# Allegro board BD9G341EFJ-E2EVK-101_BRD_REV00_2014-11-05.brd
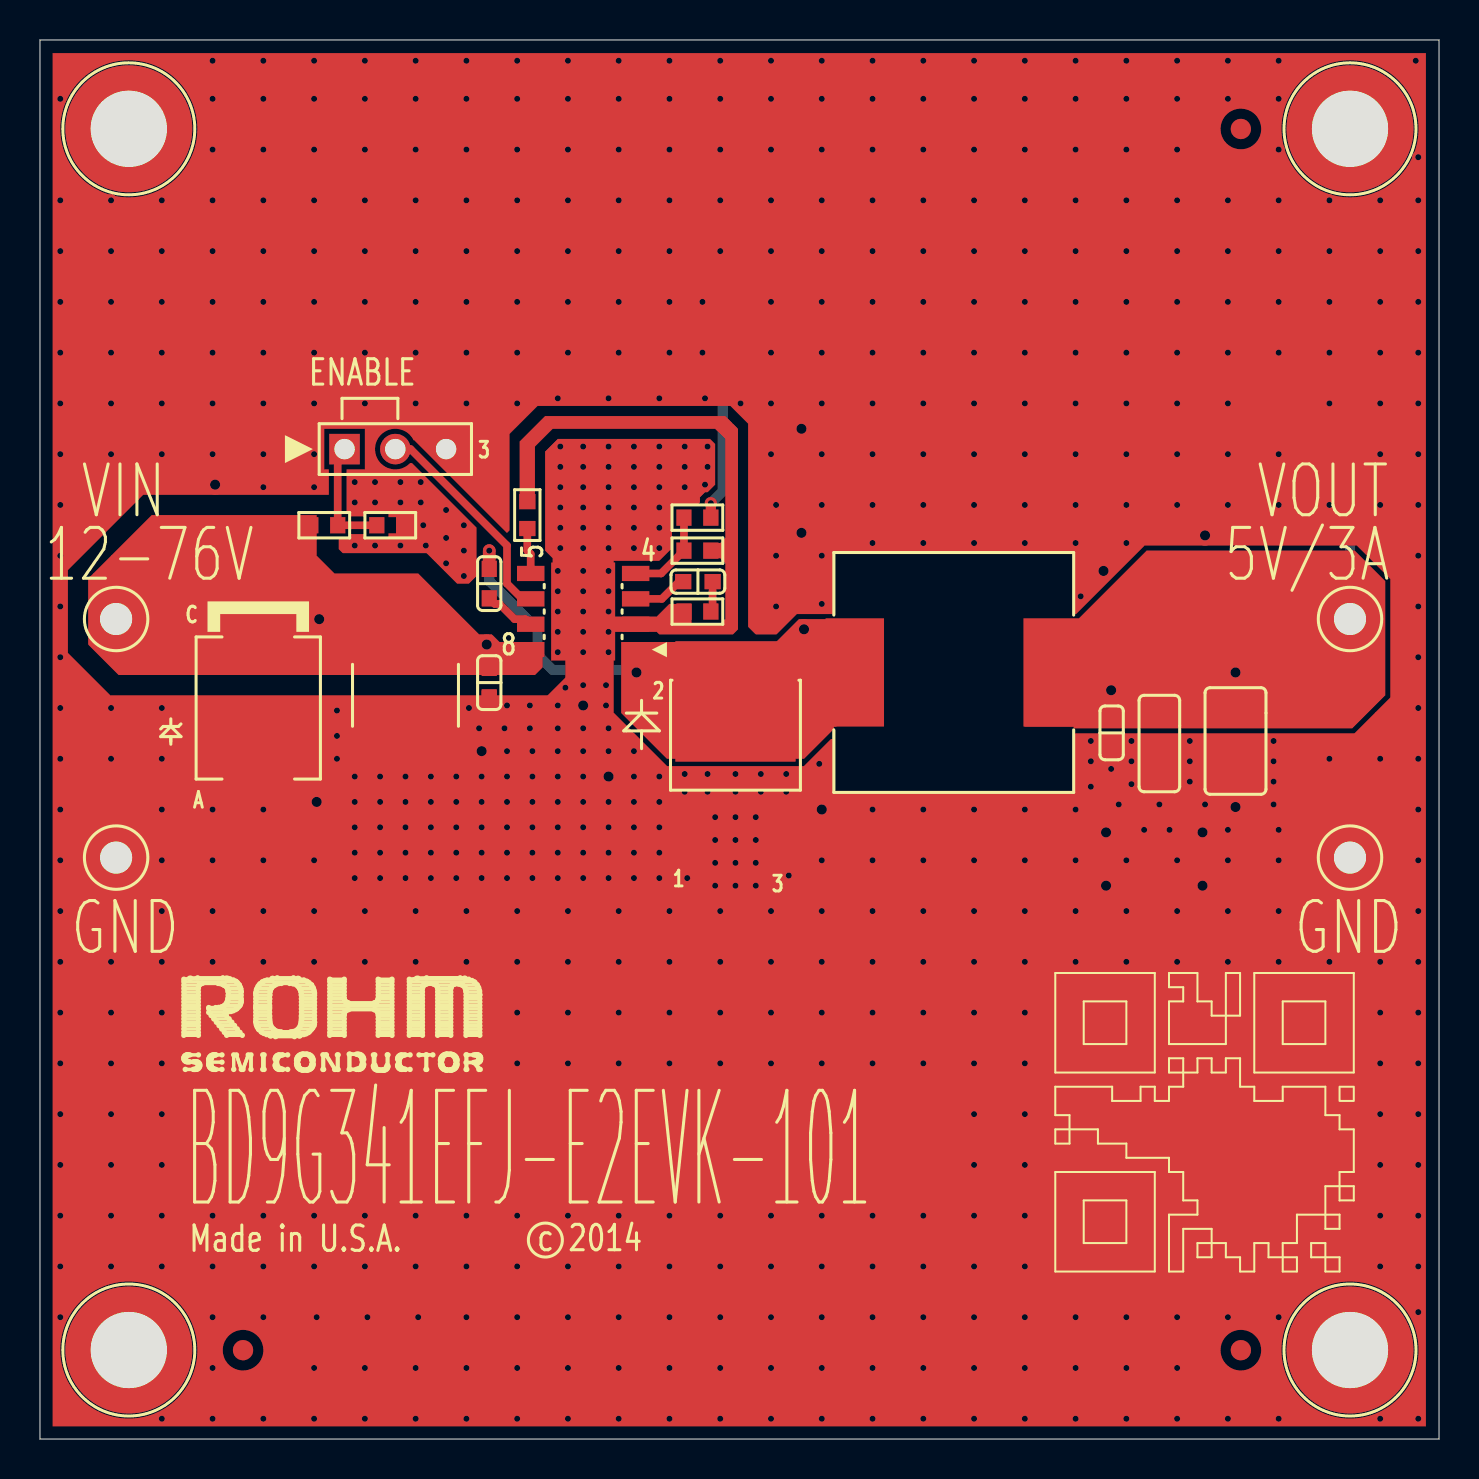
[diagram p0: board, top side]
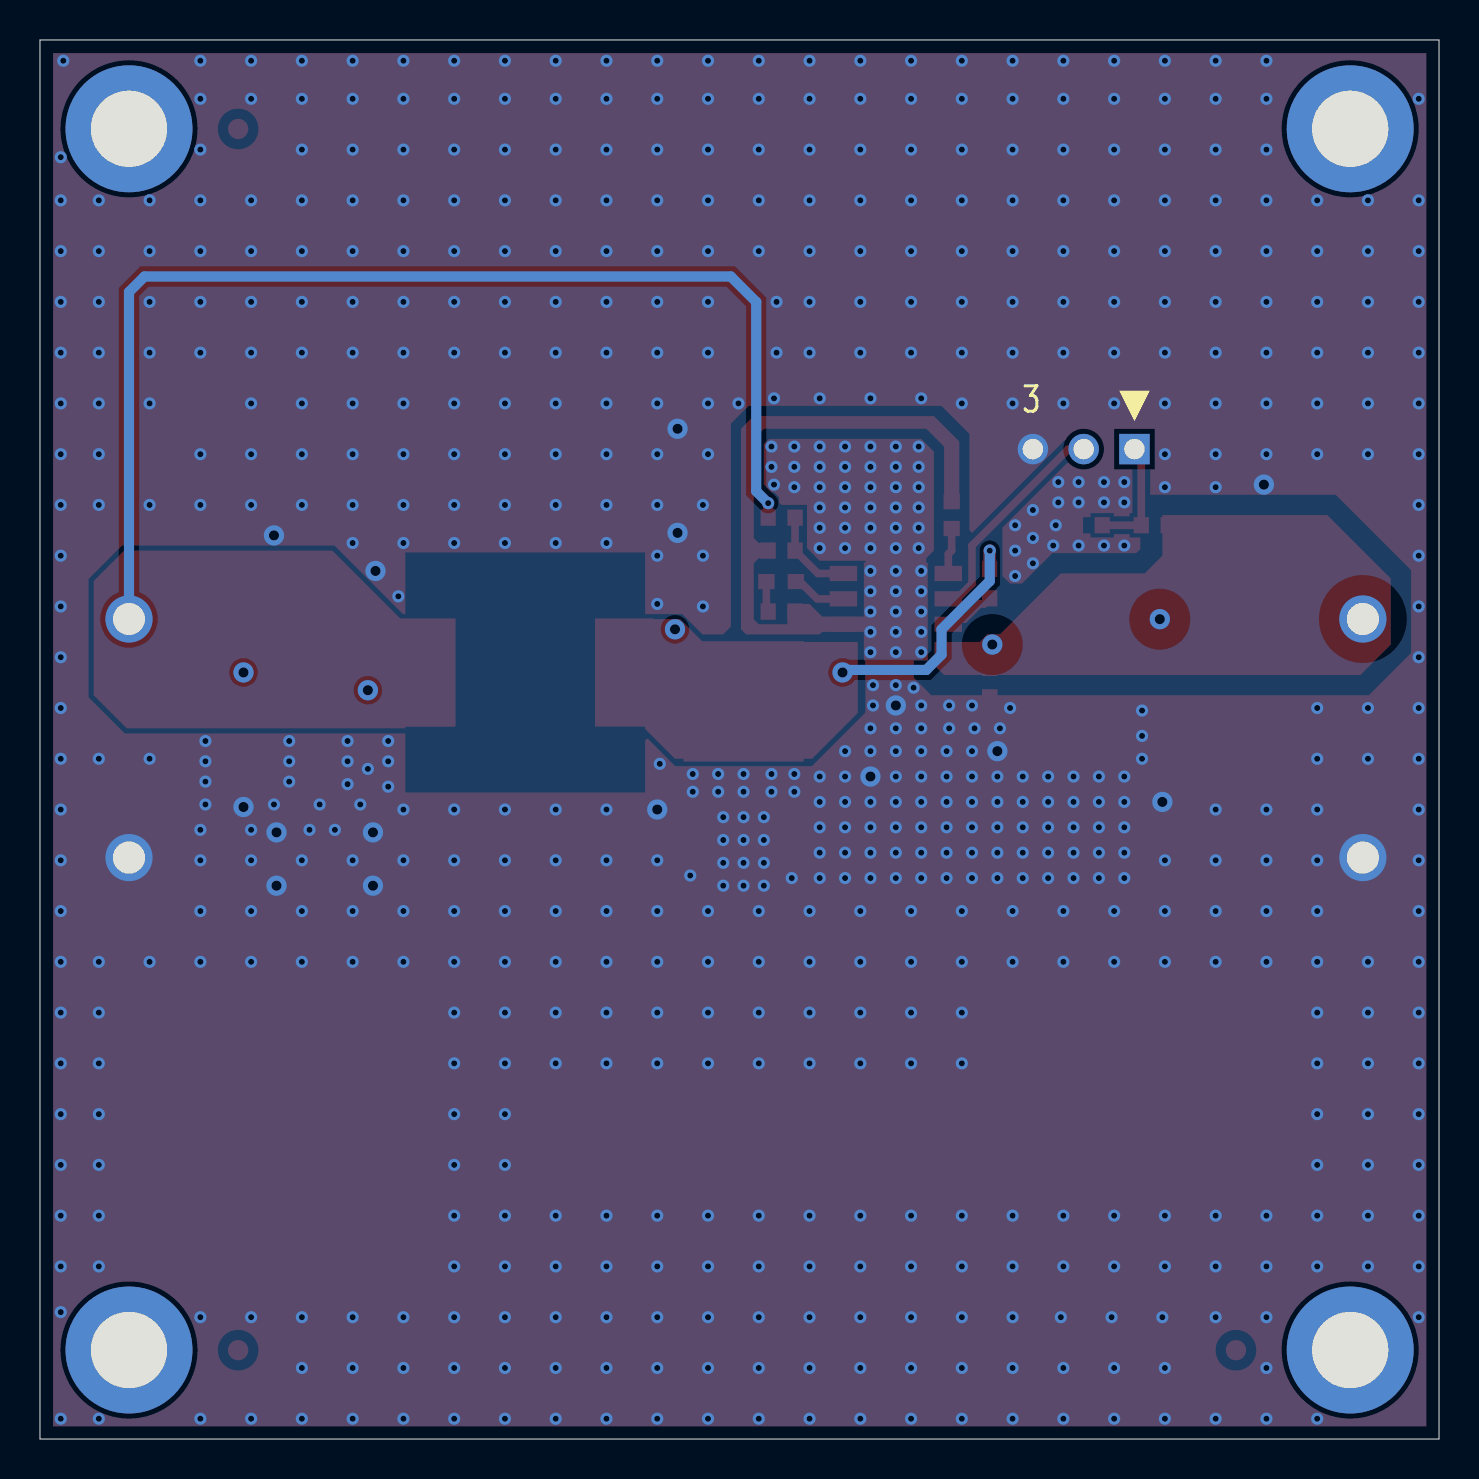
[diagram p1: board, bottom side, seen from below]

Outline 70 x 70 mm; copper layers: TOP, L2_GND, L3_GND, BOTTOM. Coordinates in mm from the lower left corner of the outline.
Outline path: 0,70 0,0 70,0 70,70 0,70

## Placement (name value [footprint] x y rotation side)
C1  10uF  [C2421]  18.29 37.21 270 top
C2  TBD  [C0603]  22.48 37.85 90 top
C3  6800pF  [C0603]  32.92 42.9 180 top
C4  0.1uF  [C0603]  22.48 42.8 90 top
C5  100uF  [C1206]  56.01 34.8 270 top
C6  TBD  [C1210]  59.82 34.92 270 top
C7  TBD  [C0603]  53.62 35.33 90 top
D1  TBD  [DO-214AB]  10.92 36.58 270 top
D2  RB095B-90TL  [SC-63]  34.8 33.66 0 top
J1  68000-103HLF  [HDR_THVT_1X3_100]  15.24 49.53 0 top
L1  33uH  [IND-4747-SMD]  45.72 38.35 90 top
NOREF  -  [unnamed]  65.55 4.45 0 top
NOREF#2  -  [unnamed]  4.45 65.55 0 top
NOREF#3  -  [#2]  0 0 0 top
NOREF#4  -  [unnamed]  4.45 4.45 0 top
NOREF#5  -  [#2]  70 0 0 top
NOREF#6  -  [unnamed#3]  60.08 4.45 0 top
NOREF#7  -  [#2]  0 70 0 top
NOREF#8  -  [unnamed#3]  10.16 4.45 0 top
NOREF#9  -  [unnamed]  65.55 65.55 0 top
NOREF#10  -  [unnamed#3]  60.08 65.55 0 top
NOREF#11  -  [#2]  0 0 0 top
NOREF#12  -  [#2]  0 70 0 top
NOREF#13  -  [#2]  -18.29 -37.33 0 top
NOREF#14  -  [#2]  -63.5 -124.58 0 top
NOREF#15  -  [#2]  70 0 90 top
R1  110k  [R0603]  14.22 45.72 0 top
R2  27k  [R0603]  17.53 45.72 0 top
R3  10k  [R0603]  32.89 41.4 180 top
R4  47k  [R0603]  24.38 46.23 90 top
R5  3k  [R0603]  32.89 46.1 180 top
R6  750  [R0603]  32.89 44.45 0 top
TP1  TP_TH_63MIL_RED  [TP_TH]  3.81 41.03 0 top
TP2  TP_TH_63MIL_BLK  [TP_TH]  3.81 29.09 0 top
TP3  TP_TH_63MIL_RED  [TP_TH]  65.55 41.03 0 top
TP4  TP_TH_63MIL_BLK  [TP_TH]  65.55 29.09 0 top
U1  BD9G341EFJ  [HTSOP-J8]  27.18 41.4 90 top

## Library data of the parts
C1 C3-C5 = CAP NP
C2 C6 C7 = CAP_VER
D1 = DIODE TVS
D2 = DIODE SCHOTTKY_3
J1 = CONN PCB 3x1_2.100"
L1 = INDUCTOR
R1-R6 = R
TP1 TP3 = TP_TH_63MIL_RED
TP2 TP4 = TP_TH_63MIL_BLK
U1 = IC_BD9G341EFJ

## Footprints (pads in the part's own frame, mm; a bottom-side part is the same pattern mirrored in y, then rotated)
C0603
  rect 0.813x0.762 smd: 1(0.737,0) 2(-0.737,0)
C1206
  rect 1.27x1.524 smd: 1(-1.524,0) 2(1.524,0)
C1210
  rect 1.524x2.54 smd: 1(-1.651,0) 2(1.651,0)
C2421
  rect 1.6x5.309 smd: 1(-2.514,0) 2(2.514,0)
DO-214AB
  rect 2.413x3.302 smd: 1(-3.3,0) 2(3.3,0)
HDR_THVT_1X3_100
  rect 1.524x1.524 hole 1.016: 1(0,0)
  round 1.524 hole 1.016: 2(2.54,0) 3(5.08,0)
HTSOP-J8
  rect 0.762x1.372 smd: 1(-1.905,-2.625) 2(-0.635,-2.625) 3(0.635,-2.625) 4(1.905,-2.625) 5(1.905,2.625) 6(0.635,2.625) 7(-0.635,2.625) 8(-1.905,2.625)
  rect 4.902x3.2 smd: 9(0,0)
IND-4747-SMD
  rect 5.41x2.921 smd: 1(0,4.95) 2(0,-4.95)
R0603
  rect 0.762x0.813 smd: 1(-0.673,0) 2(0.673,0)
SC-63
  rect 1.6x3.023 smd: 1(-2.3,-3.25) 3(2.3,-3.25)
  rect 6.02x6.02 smd: 2(0,3.25)
TP_TH
  round 2.362 hole 1.6: 1(0,0)
unnamed
  round 6.35 hole 3.81: (0,0)
unnamed#3
  round 1.016 smd: 1(0,0)

## Nets
GND: C1.2 C2.2 C5.2 C6.2 C7.2 D1.2(ANODE) D2.1(A1) D2.3(A2) J1.3 R2.2 R3.2 R4.2 R6.2 TP2.1 TP4.1 U1.2(GND) U1.9(TPAD)
VIN: C1.1 C2.1 D1.1(CATHODE) R1.1 TP1.1 U1.8(VCC)
BST: C4.2 U1.7(BST)
EN: J1.2 U1.6(EN)
FB: R5.2 R6.1 U1.4(FB)
LX: C4.1 D2.2(K) L1.1 U1.1(LX)
RT: R4.1 U1.5(RT)
VC: C3.1 U1.3(VC)
VOUT: C5.1 C6.1 C7.1 L1.2 R5.1 TP3.1
N53496: C3.2 R3.1
N54523: J1.1 R1.2 R2.1

Pads without a net: NOREF#6 1; NOREF#8 1; NOREF#10 1

## Via types
v1: diameter 1.016, hole 0.508, TOP to BOTTOM, 21 vias
v2: diameter 0.61, hole 0.305, TOP to BOTTOM, 713 vias

## Routing (per net, layer and track width the routed paths; a pad name or vN(x,y) marks a point on that pad's centre or on a via; arc(x,y) is an arc through that point)
GND: length 1
  TOP w0.635: R2.2 v2(19.18,45.72)
  vias: v1(8.76,47.75) v1(13.84,31.88) v1(22.1,34.42) v1(27.18,36.7) v1(28.45,33.15) v1(38.1,50.55) v1(38.1,45.34) v1(39.12,31.5) v1(53.21,43.43) v1(53.34,30.35) v1(53.34,27.69) v1(58.17,30.35) v1(58.17,27.69) v1(58.29,45.21) v1(59.82,31.62) v2(1.02,67.06) v2(1.02,61.98) v2(1.02,59.44) v2(1.02,56.9) v2(1.02,54.36) v2(1.02,51.82) v2(1.02,49.28) v2(1.02,46.74) v2(1.02,44.2) v2(1.02,41.66) v2(1.02,39.12) v2(1.02,36.58) v2(1.02,34.04) v2(1.02,31.5) v2(1.02,28.96) v2(1.02,26.42) v2(1.02,23.88) v2(1.02,21.34) v2(1.02,18.8) v2(1.02,16.26) v2(1.02,13.72) v2(1.02,11.18) v2(1.02,8.64) v2(1.02,6.1) v2(3.56,61.98) v2(3.56,59.44) v2(3.56,56.9) v2(3.56,54.36) v2(3.56,51.82) v2(3.56,49.28) v2(3.56,36.58) v2(3.56,34.04) v2(3.56,23.88) v2(3.56,21.34) v2(3.56,18.8) v2(3.56,16.26) v2(3.56,13.72) v2(3.56,11.18) v2(3.56,8.64) v2(6.1,61.98) v2(6.1,59.44) v2(6.1,56.9) v2(6.1,54.36) v2(6.1,51.82) v2(6.1,49.28) v2(6.1,36.58) v2(6.1,34.04) v2(6.1,31.5) v2(6.1,28.96) v2(6.1,26.42) v2(6.1,23.88) v2(6.1,21.34) v2(6.1,18.8) v2(6.1,16.26) v2(6.1,13.72) v2(6.1,11.18) v2(6.1,8.64) v2(6.1,1.02) v2(8.64,68.96) v2(8.64,67.06) v2(8.64,64.52) v2(8.64,61.98) v2(8.64,59.44) v2(8.64,56.9) v2(8.64,54.36) v2(8.64,51.82) v2(8.64,49.28) v2(8.64,31.5) v2(8.64,28.96) v2(8.64,26.42) v2(8.64,23.88) v2(8.64,11.18) v2(8.64,8.64) v2(8.64,6.1) v2(8.64,3.56) v2(8.64,1.02) v2(11.18,68.96) v2(11.18,67.06) v2(11.18,64.52) v2(11.18,61.98) v2(11.18,59.44) v2(11.18,56.9) v2(11.18,54.36) v2(11.18,51.82) v2(11.18,49.28) v2(11.18,47.62) v2(11.18,31.5) v2(11.18,28.96) v2(11.18,26.42) v2(11.18,23.88) v2(11.18,11.18) v2(11.18,8.64) v2(11.18,6.1) v2(11.18,1.02) v2(13.72,68.96) v2(13.72,67.06) v2(13.72,64.52) v2(13.72,61.98) v2(13.72,59.44) v2(13.72,56.9) v2(13.72,54.36) v2(13.72,51.82) v2(13.72,49.28) v2(13.72,47.62) v2(13.72,28.96) v2(13.72,26.42) v2(13.72,23.88) v2(13.72,11.18) v2(13.72,8.64) v2(13.72,3.56) v2(13.72,1.02) v2(13.84,6.1) v2(14.86,36.45) v2(14.86,35.18) v2(14.86,34.04) v2(15.75,47.88) v2(15.75,46.86) v2(15.75,44.7) v2(15.75,33.15) v2(15.75,31.88) v2(15.75,30.61) v2(15.75,29.34) v2(15.75,28.07) v2(16.26,68.96) v2(16.26,67.06) v2(16.26,64.52) v2(16.26,61.98) v2(16.26,59.44) v2(16.26,56.9) v2(16.26,54.36) v2(16.26,51.82) v2(16.26,26.42) v2(16.26,23.88) v2(16.26,11.18) v2(16.26,8.64) v2(16.26,3.56) v2(16.26,1.02) v2(16.38,6.1) v2(16.76,47.88) v2(16.76,46.86) v2(16.76,44.7) v2(17.02,33.15) v2(17.02,31.88) v2(17.02,30.61) v2(17.02,29.34) v2(17.02,28.07) v2(18.03,47.88) v2(18.03,46.86) v2(18.03,44.7) v2(18.29,33.15) v2(18.29,31.88) v2(18.29,30.61) v2(18.29,29.34) v2(18.29,28.07) v2(18.8,68.96) v2(18.8,67.06) v2(18.8,64.52) v2(18.8,61.98) v2(18.8,59.44) v2(18.8,56.9) v2(18.8,54.36) v2(18.8,51.82) v2(18.8,26.42) v2(18.8,23.88) v2(18.8,11.18) v2(18.8,8.64) v2(18.8,3.56) v2(18.8,1.02) v2(18.92,6.1) v2(19.05,47.88) v2(19.05,46.86) v2(19.3,44.7) v2(19.56,33.15) v2(19.56,31.88) v2(19.56,30.61) v2(19.56,29.34) v2(19.56,28.07) v2(20.32,46.48) v2(20.32,45.09) v2(20.32,43.81) v2(20.83,33.15) v2(20.83,31.88) v2(20.83,30.61) v2(20.83,29.34) v2(20.83,28.07) v2(21.21,45.72) v2(21.21,44.45) v2(21.21,43.18) v2(21.34,68.96) v2(21.34,67.06) v2(21.34,64.52) v2(21.34,61.98) v2(21.34,59.44) v2(21.34,56.9) v2(21.34,54.36) v2(21.34,51.82) v2(21.34,26.42) v2(21.34,23.88) v2(21.34,11.18) v2(21.34,8.64) v2(21.34,6.1) v2(21.34,3.56) v2(21.34,1.02) v2(21.46,36.58) v2(21.97,35.56) v2(22.1,33.15) v2(22.1,31.88) v2(22.1,30.61) v2(22.1,29.34) v2(22.1,28.07) v2(23.24,35.56) v2(23.37,36.7) v2(23.37,34.42) v2(23.37,33.15) v2(23.37,31.88) v2(23.37,30.61) v2(23.37,29.34) v2(23.37,28.07) v2(23.88,68.96) v2(23.88,67.06) v2(23.88,64.52) v2(23.88,61.98) v2(23.88,59.44) v2(23.88,56.9) v2(23.88,54.36) v2(23.88,51.82) v2(23.88,26.42) v2(23.88,23.88) v2(23.88,21.34) v2(23.88,18.8) v2(23.88,11.18) v2(23.88,8.64) v2(23.88,6.1) v2(23.88,3.56) v2(23.88,1.02) v2(24.51,36.7) v2(24.51,35.56) v2(24.64,34.42) v2(24.64,33.15) v2(24.64,31.88) v2(24.64,30.61) v2(24.64,29.34) v2(24.64,28.07) v2(25.91,52.07) v2(25.91,43.43) v2(25.91,42.42) v2(25.91,41.4) v2(25.91,40.39) v2(25.91,39.37) v2(25.91,36.7) v2(25.91,35.56) v2(25.91,34.42) v2(25.91,33.15) v2(25.91,31.88) v2(25.91,30.61) v2(25.91,29.34) v2(25.91,28.07) v2(26.04,49.66) v2(26.04,48.64) v2(26.04,47.62) v2(26.04,46.61) v2(26.04,45.59) v2(26.04,44.58) v2(26.29,37.59) v2(26.42,68.96) v2(26.42,67.06) v2(26.42,64.52) v2(26.42,61.98) v2(26.42,59.44) v2(26.42,56.9) v2(26.42,54.36) v2(26.42,26.42) v2(26.42,23.88) v2(26.42,21.34) v2(26.42,18.8) v2(26.42,11.18) v2(26.42,8.64) v2(26.42,6.1) v2(26.42,3.56) v2(26.42,1.02) v2(27.18,49.66) v2(27.18,48.64) v2(27.18,47.62) v2(27.18,46.61) v2(27.18,45.59) v2(27.18,44.58) v2(27.18,43.43) v2(27.18,42.42) v2(27.18,41.4) v2(27.18,40.39) v2(27.18,39.37) v2(27.18,37.72) v2(27.18,35.56) v2(27.18,34.42) v2(27.18,33.15) v2(27.18,31.88) v2(27.18,30.61) v2(27.18,29.34) v2(27.18,28.07) v2(28.32,37.72) v2(28.32,36.7) v2(28.45,52.07) v2(28.45,49.66) v2(28.45,48.64) v2(28.45,47.62) v2(28.45,46.61) v2(28.45,45.59) v2(28.45,44.58) v2(28.45,43.43) v2(28.45,42.42) v2(28.45,41.4) v2(28.45,40.39) v2(28.45,39.37) v2(28.45,35.56) v2(28.45,34.42) v2(28.45,31.88) v2(28.45,30.61) v2(28.45,29.34) v2(28.45,28.07) v2(28.96,68.96) v2(28.96,67.06) v2(28.96,64.52) v2(28.96,61.98) v2(28.96,59.44) v2(28.96,56.9) v2(28.96,54.36) v2(28.96,26.42) v2(28.96,23.88) v2(28.96,21.34) v2(28.96,18.8) v2(28.96,11.18) v2(28.96,8.64) v2(28.96,6.1) v2(28.96,3.56) v2(28.96,1.02) v2(29.72,49.66) v2(29.72,48.64) v2(29.72,47.62) v2(29.72,46.61) v2(29.72,45.59) v2(29.72,44.58) v2(29.72,34.42) v2(29.72,33.15) v2(29.72,31.88) v2(29.72,30.61) v2(29.72,29.34) v2(29.72,28.07) v2(30.99,52.07) v2(30.99,49.66) v2(30.99,48.64) v2(30.99,47.62) v2(30.99,46.61) v2(30.99,45.59) v2(30.99,44.58) v2(30.99,33.15) v2(30.99,31.88) v2(30.99,30.61) v2(30.99,29.34) v2(30.99,28.07) v2(31.5,68.96) v2(31.5,67.06) v2(31.5,64.52) v2(31.5,61.98) v2(31.5,59.44) v2(31.5,56.9) v2(31.5,54.36) v2(31.5,26.42) v2(31.5,23.88) v2(31.5,21.34) v2(31.5,18.8) v2(31.5,11.18) v2(31.5,8.64) v2(31.5,6.1) v2(31.5,3.56) v2(31.5,1.02) v2(32.26,49.66) v2(32.26,48.64) v2(32.26,47.62) v2(32.26,33.27) v2(32.26,32.38) v2(32.38,28.07) v2(33.15,56.9) v2(33.15,54.36) v2(33.27,52.07) v2(33.27,47.75) v2(33.4,49.66) v2(33.4,48.64) v2(33.4,33.27) v2(33.4,32.38) v2(33.78,31.11) v2(33.78,29.97) v2(33.78,28.83) v2(33.78,27.69) v2(34.04,68.96) v2(34.04,67.06) v2(34.04,64.52) v2(34.04,61.98) v2(34.04,59.44) v2(34.04,26.42) v2(34.04,23.88) v2(34.04,21.34) v2(34.04,18.8) v2(34.04,11.18) v2(34.04,8.64) v2(34.04,6.1) v2(34.04,3.56) v2(34.04,1.02) v2(34.8,33.27) v2(34.8,32.38) v2(34.8,31.11) v2(34.8,29.97) v2(34.8,28.83) v2(34.8,27.69) v2(35.05,51.82) v2(35.81,31.11) v2(35.81,29.97) v2(35.81,28.83) v2(35.81,27.69) v2(36.07,33.27) v2(36.07,32.38) v2(36.58,68.96) v2(36.58,67.06) v2(36.58,64.52) v2(36.58,61.98) v2(36.58,59.44) v2(36.58,56.9) v2(36.58,54.36) v2(36.58,51.82) v2(36.58,49.28) v2(36.58,26.42) v2(36.58,23.88) v2(36.58,21.34) v2(36.58,18.8) v2(36.58,11.18) v2(36.58,8.64) v2(36.58,6.1) v2(36.58,3.56) v2(36.58,1.02) v2(36.83,46.74) v2(36.83,44.2) v2(36.83,41.66) v2(37.34,33.27) v2(37.34,32.38) v2(37.47,28.19) v2(38.99,33.78) v2(39.12,68.96) v2(39.12,67.06) v2(39.12,64.52) v2(39.12,61.98) v2(39.12,59.44) v2(39.12,56.9) v2(39.12,54.36) v2(39.12,51.82) v2(39.12,49.28) v2(39.12,46.74) v2(39.12,44.2) v2(39.12,41.78) v2(39.12,28.96) v2(39.12,26.42) v2(39.12,23.88) v2(39.12,21.34) v2(39.12,18.8) v2(39.12,11.18) v2(39.12,8.64) v2(39.12,6.1) v2(39.12,3.56) v2(39.12,1.02) v2(41.66,68.96) v2(41.66,67.06) v2(41.66,64.52) v2(41.66,61.98) v2(41.66,59.44) v2(41.66,56.9) v2(41.66,54.36) v2(41.66,51.82) v2(41.66,49.28) v2(41.66,46.74) v2(41.66,44.83) v2(41.66,31.5) v2(41.66,28.96) v2(41.66,26.42) v2(41.66,23.88) v2(41.66,21.34) v2(41.66,18.8) v2(41.66,11.18) v2(41.66,8.64) v2(41.66,6.1) v2(41.66,3.56) v2(41.66,1.02) v2(44.2,68.96) v2(44.2,67.06) v2(44.2,64.52) v2(44.2,61.98) v2(44.2,59.44) v2(44.2,56.9) v2(44.2,54.36) v2(44.2,51.82) v2(44.2,49.28) v2(44.2,46.74) v2(44.2,44.83) v2(44.2,31.5) v2(44.2,28.96) v2(44.2,26.42) v2(44.2,23.88) v2(44.2,21.34) v2(44.2,18.8) v2(44.2,11.18) v2(44.2,8.64) v2(44.2,6.1) v2(44.2,3.56) v2(44.2,1.02) v2(46.74,68.96) v2(46.74,67.06) v2(46.74,64.52) v2(46.74,61.98) v2(46.74,59.44) v2(46.74,56.9) v2(46.74,54.36) v2(46.74,51.82) v2(46.74,49.28) v2(46.74,46.74) v2(46.74,44.83) v2(46.74,31.5) v2(46.74,28.96) v2(46.74,26.42) v2(46.74,23.88) v2(46.74,21.34) v2(46.74,18.8) v2(46.74,16.26) v2(46.74,13.72) v2(46.74,11.18) v2(46.74,8.64) v2(46.74,6.1) v2(46.74,3.56) v2(46.74,1.02) v2(49.28,68.96) v2(49.28,67.06) v2(49.28,64.52) v2(49.28,61.98) v2(49.28,59.44) v2(49.28,56.9) v2(49.28,54.36) v2(49.28,51.82) v2(49.28,49.28) v2(49.28,46.74) v2(49.28,44.83) v2(49.28,31.5) v2(49.28,28.96) v2(49.28,26.42) v2(49.28,23.88) v2(49.28,21.34) v2(49.28,18.8) v2(49.28,16.26) v2(49.28,13.72) v2(49.28,11.18) v2(49.28,8.64) v2(49.28,6.1) v2(49.28,3.56) v2(49.28,1.02) v2(51.82,68.96) v2(51.82,67.06) v2(51.82,64.52) v2(51.82,61.98) v2(51.82,59.44) v2(51.82,56.9) v2(51.82,54.36) v2(51.82,51.82) v2(51.82,49.28) v2(51.82,46.74) v2(51.82,44.83) v2(51.82,31.5) v2(51.82,28.96) v2(51.82,26.42) v2(51.82,23.88) v2(51.82,6.1) v2(51.82,3.56) v2(51.82,1.02) v2(52.07,42.16) v2(52.58,34.92) v2(52.58,33.91) v2(52.58,32.64) v2(53.59,33.53) v2(53.98,31.75) v2(54.36,68.96) v2(54.36,67.06) v2(54.36,64.52) v2(54.36,61.98) v2(54.36,59.44) v2(54.36,56.9) v2(54.36,54.36) v2(54.36,51.82) v2(54.36,49.28) v2(54.36,46.74) v2(54.36,44.83) v2(54.36,28.96) v2(54.36,26.42) v2(54.36,23.88) v2(54.36,6.1) v2(54.36,3.56) v2(54.36,1.02) v2(54.61,34.92) v2(54.61,33.91) v2(54.61,32.77) v2(55.24,30.48) v2(56.01,31.75) v2(56.52,30.48) v2(56.9,68.96) v2(56.9,67.06) v2(56.9,64.52) v2(56.9,61.98) v2(56.9,59.44) v2(56.9,56.9) v2(56.9,54.36) v2(56.9,51.82) v2(56.9,49.28) v2(56.9,46.74) v2(56.9,28.96) v2(56.9,26.42) v2(56.9,23.88) v2(56.9,6.1) v2(56.9,3.56) v2(56.9,1.02) v2(57.53,34.92) v2(57.53,33.91) v2(57.53,32.89) v2(58.29,31.75) v2(59.44,68.96) v2(59.44,67.06) v2(59.44,61.98) v2(59.44,59.44) v2(59.44,56.9) v2(59.44,54.36) v2(59.44,51.82) v2(59.44,49.28) v2(59.44,46.74) v2(59.44,30.48) v2(59.44,28.96) v2(59.44,26.42) v2(59.44,23.88) v2(59.44,6.1) v2(59.44,1.02) v2(61.72,34.92) v2(61.72,33.91) v2(61.72,32.89) v2(61.72,31.75) v2(61.98,68.96) v2(61.98,67.06) v2(61.98,64.52) v2(61.98,61.98) v2(61.98,59.44) v2(61.98,56.9) v2(61.98,54.36) v2(61.98,49.28) v2(61.98,46.74) v2(61.98,30.48) v2(61.98,28.96) v2(61.98,26.42) v2(61.98,23.88) v2(61.98,6.1) v2(61.98,1.02) v2(64.52,61.98) v2(64.52,59.44) v2(64.52,56.9) v2(64.52,54.36) v2(64.52,51.82) v2(64.52,46.74) v2(64.52,34.04) v2(64.52,23.88) v2(67.06,61.98) v2(67.06,59.44) v2(67.06,56.9) v2(67.06,54.36) v2(67.06,51.82) v2(67.06,49.28) v2(67.06,46.74) v2(67.06,34.04) v2(67.06,23.88) v2(67.06,21.34) v2(67.06,18.8) v2(67.06,16.26) v2(67.06,13.72) v2(67.06,11.18) v2(67.06,8.64) v2(67.06,1.02) v2(68.83,68.96) v2(68.96,64.14) v2(68.96,61.98) v2(68.96,59.44) v2(68.96,56.9) v2(68.96,54.36) v2(68.96,51.82) v2(68.96,49.28) v2(68.96,46.74) v2(68.96,44.2) v2(68.96,41.66) v2(68.96,39.12) v2(68.96,36.58) v2(68.96,34.04) v2(68.96,31.5) v2(68.96,28.96) v2(68.96,26.42) v2(68.96,23.88) v2(68.96,21.34) v2(68.96,18.8) v2(68.96,16.26) v2(68.96,13.72) v2(68.96,11.18) v2(68.96,8.64) v2(68.96,6.35) v2(68.96,1.02)
VIN:
  vias: v1(13.97,41.02) v1(22.35,39.75)
BST: length 2.6
  TOP w0.381: C4.2 22.76,41.78 22.99,41.78 23.75,41.02 24.3,41.02 U1.7
EN: length 11
  TOP w0.381: U1.6 24.13,42.04 23.37,42.8 23.37,44.7 18.54,49.53 J1.2
FB: length 4.5
  TOP w0.381: R5.2 R6.1 31.08,43.31 U1.4
LX: length 12.4
  TOP w0.635: C4.1 v2(22.48,44.45)
  BOTTOM w0.508: v1(29.84,38.35) 29.72,38.48 25.65,38.48 24.89,39.24 24.89,40.51 22.48,42.93 v2(22.48,44.45)
  vias: v1(38.23,40.51)
RT: length 2.3
  TOP w0.381: U1.5 24.55,44.28 24.38,44.45 R4.1
VC: length 2.7
  TOP w0.381: C3.1 31.98,42.9 31.11,42.04 U1.3
VOUT: length 59.6
  TOP w0.508: R5.1 v2(33.57,46.82)
  BOTTOM w0.508: v2(33.57,46.82) 34.16,47.42 34.16,56.9 35.43,58.17 64.77,58.17 65.55,57.39 TP3.1
  vias: v1(53.59,37.47) v1(59.82,38.35)
N53496: length 1.5
  TOP w0.381: C3.2 33.66,41.49 R3.1
N54523: length 5.9
  TOP w0.381: J1.1 14.9,49.19 R1.2 R2.1

## Copper pours and planes (outline as drawn; the poured copper is in the pictures)
GND on TOP (solid shape): 69.34,0.64 0.64,0.64 0.64,4.54 1.02,4.54 1.02,4.37 1.02,4.2 1.04,4.04 1.06,3.88 1.1,3.71 1.14,3.55 1.18,3.39 1.24,3.24 1.3,3.08 1.37,2.93 1.45,2.79 1.53,2.64 1.62,2.5 1.72,2.37 1.82,2.24 1.93,2.12 2.05,2 2.17,1.89 2.3,1.78 2.43,1.68 2.57,1.58 2.71,1.5 2.85,1.42 3,1.34 3.15,1.28 3.31,1.22 3.46,1.17 3.62,1.12 3.79,1.09 3.95,1.06 4.11,1.04 4.28,1.03 4.45,1.02 4.61,1.03 4.78,1.04 4.94,1.06 5.1,1.09 5.27,1.12 5.43,1.17 5.58,1.22 5.74,1.28 5.89,1.34 6.04,1.42 6.18,1.5 6.32,1.58 6.46,1.68 6.59,1.78 6.72,1.89 6.84,2 6.96,2.12 7.07,2.24 7.17,2.37 7.27,2.5 7.36,2.64 7.44,2.79 7.52,2.93 7.59,3.08 7.65,3.24 7.71,3.39 7.75,3.55 7.79,3.71 7.83,3.88 7.85,4.04 7.87,4.2 7.87,4.37 7.87,4.45 9.14,4.45 9.15,4.36 9.16,4.27 9.18,4.18 9.21,4.09 9.24,4.01 9.28,3.93 9.33,3.85 9.39,3.78 9.45,3.72 9.52,3.66 9.59,3.6 9.66,3.56 9.75,3.52 9.83,3.48 9.92,3.46 10,3.44 10.09,3.43 10.18,3.43 10.27,3.43 10.36,3.45 10.45,3.47 10.53,3.5 10.62,3.54 10.69,3.58 10.77,3.63 10.84,3.69 10.9,3.75 10.96,3.82 11.01,3.89 11.06,3.97 11.1,4.05 11.13,4.14 11.15,4.22 11.17,4.31 11.18,4.4 11.18,4.45 59.07,4.45 59.07,4.36 59.08,4.27 59.1,4.18 59.13,4.09 59.17,4.01 59.21,3.93 59.26,3.85 59.31,3.78 59.37,3.72 59.44,3.66 59.51,3.6 59.59,3.56 59.67,3.52 59.75,3.48 59.84,3.46 59.93,3.44 60.02,3.43 60.11,3.43 60.2,3.43 60.29,3.45 60.37,3.47 60.46,3.5 60.54,3.54 60.62,3.58 60.69,3.63 60.76,3.69 60.83,3.75 60.89,3.82 60.94,3.89 60.98,3.97 61.02,4.05 61.05,4.14 61.08,4.22 61.09,4.31 61.1,4.4 61.1,4.49 61.1,4.54 62.12,4.54 62.12,4.37 62.13,4.2 62.14,4.04 62.17,3.88 62.2,3.71 62.24,3.55 62.28,3.39 62.34,3.24 62.4,3.08 62.47,2.93 62.55,2.79 62.63,2.64 62.72,2.5 62.82,2.37 62.92,2.24 63.03,2.12 63.15,2 63.27,1.89 63.4,1.78 63.53,1.68 63.67,1.58 63.81,1.5 63.95,1.42 64.1,1.34 64.25,1.28 64.41,1.22 64.57,1.17 64.73,1.12 64.89,1.09 65.05,1.06 65.21,1.04 65.38,1.03 65.55,1.02 65.71,1.03 65.88,1.04 66.04,1.06 66.2,1.09 66.37,1.12 66.53,1.17 66.68,1.22 66.84,1.28 66.99,1.34 67.14,1.42 67.28,1.5 67.43,1.58 67.56,1.68 67.69,1.78 67.82,1.89 67.94,2 68.06,2.12 68.17,2.24 68.27,2.37 68.37,2.5 68.46,2.64 68.54,2.79 68.62,2.93 68.69,3.08 68.75,3.24 68.81,3.39 68.86,3.55 68.89,3.71 68.93,3.88 68.95,4.04 68.97,4.2 68.97,4.37 68.97,4.54 68.97,4.7 68.95,4.87 68.93,5.03 68.89,5.19 68.86,5.35 68.81,5.51 68.75,5.67 68.69,5.82 68.62,5.97 68.54,6.12 68.46,6.26 68.37,6.4 68.27,6.54 68.17,6.66 68.06,6.79 67.94,6.91 67.82,7.02 67.69,7.13 67.56,7.23 67.43,7.32 67.28,7.41 67.14,7.49 66.99,7.56 66.84,7.63 66.68,7.69 66.53,7.74 66.37,7.78 66.2,7.82 66.04,7.85 65.88,7.87 65.71,7.88 65.55,7.88 65.38,7.88 65.21,7.87 65.05,7.85 64.89,7.82 64.73,7.78 64.57,7.74 64.41,7.69 64.25,7.63 64.1,7.56 63.95,7.49 63.81,7.41 63.67,7.32 63.53,7.23 63.4,7.13 63.27,7.02 63.15,6.91 63.03,6.79 62.92,6.66 62.82,6.54 62.72,6.4 62.63,6.26 62.55,6.12 62.47,5.97 62.4,5.82 62.34,5.67 62.28,5.51 62.24,5.35 62.2,5.19 62.17,5.03 62.14,4.87 62.13,4.7 62.12,4.54 61.1,4.54 61.09,4.58 61.08,4.67 61.05,4.75 61.02,4.84 60.98,4.92 60.94,5 60.89,5.07 60.83,5.14 60.76,5.2 60.69,5.26 60.62,5.31 60.54,5.35 60.46,5.39 60.37,5.42 60.29,5.44 60.2,5.46 60.11,5.46 60.02,5.46 59.93,5.45 59.84,5.43 59.75,5.41 59.67,5.37 59.59,5.33 59.51,5.29 59.44,5.23 59.37,5.17 59.31,5.11 59.26,5.04 59.21,4.96 59.17,4.88 59.13,4.8 59.1,4.71 59.08,4.62 59.07,4.53 59.07,4.45 11.18,4.45 11.18,4.49 11.17,4.58 11.15,4.67 11.13,4.75 11.1,4.84 11.06,4.92 11.01,5 10.96,5.07 10.9,5.14 10.84,5.2 10.77,5.26 10.69,5.31 10.62,5.35 10.53,5.39 10.45,5.42 10.36,5.44 10.27,5.46 10.18,5.46 10.09,5.46 10,5.45 9.92,5.43 9.83,5.41 9.75,5.37 9.66,5.33 9.59,5.29 9.52,5.23 9.45,5.17 9.39,5.11 9.33,5.04 9.28,4.96 9.24,4.88 9.21,4.8 9.18,4.71 9.16,4.62 9.15,4.53 9.14,4.45 7.87,4.45 7.87,4.54 7.87,4.7 7.85,4.87 7.83,5.03 7.79,5.19 7.75,5.35 7.71,5.51 7.65,5.67 7.59,5.82 7.52,5.97 7.44,6.12 7.36,6.26 7.27,6.4 7.17,6.54 7.07,6.66 6.96,6.79 6.84,6.91 6.72,7.02 6.59,7.13 6.46,7.23 6.32,7.32 6.18,7.41 6.04,7.49 5.89,7.56 5.74,7.63 5.58,7.69 5.43,7.74 5.27,7.78 5.1,7.82 4.94,7.85 4.78,7.87 4.61,7.88 4.45,7.88 4.28,7.88 4.11,7.87 3.95,7.85 3.79,7.82 3.62,7.78 3.46,7.74 3.31,7.69 3.15,7.63 3,7.56 2.85,7.49 2.71,7.41 2.57,7.32 2.43,7.23 2.3,7.13 2.17,7.02 2.05,6.91 1.93,6.79 1.82,6.66 1.72,6.54 1.62,6.4 1.53,6.26 1.45,6.12 1.37,5.97 1.3,5.82 1.24,5.67 1.18,5.51 1.14,5.35 1.1,5.19 1.06,5.03 1.04,4.87 1.02,4.7 1.02,4.54 0.64,4.54 0.64,43.47 1.4,43.47 1.4,39.33 3.52,37.21 22.1,37.21 22.1,37.47 22.86,37.47 22.86,37.21 25.4,37.21 26.29,38.1 26.29,38.99 25.65,38.99 25.65,44.07 25.27,44.45 25.27,49.4 25.91,50.04 33.53,50.04 33.78,49.78 33.78,47.75 33.4,47.37 33.27,47.37 33.02,47.12 33.02,46.86 32.89,46.74 31.62,46.74 31.62,44.58 30.99,43.94 28.7,43.94 28.7,41.15 30.86,41.15 31.5,41.78 32.6,41.78 32.6,40.77 34.04,40.77 34.29,41.02 34.29,43.81 34.04,44.07 33.27,44.07 33.27,44.83 34.04,44.83 34.29,45.09 34.29,50.04 33.78,50.55 25.65,50.55 24.77,49.66 24.77,46.61 24,46.61 24,49.91 25.27,51.18 34.29,51.18 34.92,50.55 34.92,40.51 34.67,40.26 30.99,40.26 30.86,40.39 28.7,40.39 28.7,36.34 31.38,33.67 38.22,33.67 39.55,35 39.56,35.01 39.58,35.02 39.61,35.03 39.64,35.02 39.67,35.01 39.69,34.99 39.71,34.97 39.72,34.94 39.72,34.92 39.72,32.35 51.72,32.35 51.72,35.31 65.76,35.31 67.56,37.11 67.56,43.03 65.89,44.7 55.27,44.7 51.84,41.28 51.72,41.28 51.72,44.36 39.72,44.36 39.72,41.28 37.87,41.28 36.85,40.26 35.81,40.26 35.43,40.64 35.43,50.8 34.54,51.69 24.89,51.69 23.5,50.29 23.5,45.47 23.36,45.34 18.73,49.97 18.69,49.97 18.66,50.04 18.61,50.12 18.55,50.19 18.49,50.26 18.42,50.32 18.35,50.37 18.27,50.42 18.19,50.46 18.11,50.49 18.02,50.52 17.93,50.54 17.84,50.54 17.75,50.55 17.66,50.54 17.57,50.52 17.48,50.5 17.4,50.47 17.31,50.43 17.23,50.39 17.16,50.34 17.09,50.28 17.03,50.21 16.97,50.14 16.92,50.07 16.87,49.99 16.84,49.91 16.81,49.82 16.78,49.73 16.77,49.64 16.76,49.55 16.77,49.46 16.78,49.37 16.79,49.28 16.82,49.19 16.85,49.11 16.9,49.03 16.94,48.95 17,48.88 17.06,48.81 17.13,48.75 17.2,48.7 17.28,48.65 17.36,48.61 17.44,48.57 17.53,48.54 17.62,48.53 17.71,48.52 17.8,48.51 17.89,48.52 17.98,48.53 18.07,48.55 18.15,48.58 18.24,48.62 18.32,48.67 18.39,48.72 18.46,48.78 18.53,48.83 18.55,48.84 18.58,48.84 18.6,48.83 18.64,48.81 21.84,45.6 21.84,43.18 21.46,42.8 20.87,42.8 19.34,44.32 15.15,44.32 14.95,44.53 14.95,45.11 15.48,45.11 15.48,45.28 16.27,45.28 16.27,45.11 17.44,45.11 17.44,45.31 17.82,45.31 17.82,46.13 17.44,46.13 17.44,46.33 16.27,46.33 16.27,46.16 15.48,46.16 15.48,46.33 15.34,46.33 15.34,48.51 16.26,48.51 16.26,50.55 14.22,50.55 14.22,48.51 14.45,48.51 14.45,47.24 5.17,47.24 1.4,43.47 0.64,43.47 0.64,65.64 1.02,65.64 1.02,65.47 1.02,65.31 1.04,65.14 1.06,64.98 1.1,64.81 1.14,64.65 1.18,64.5 1.24,64.34 1.3,64.19 1.37,64.03 1.45,63.89 1.53,63.75 1.62,63.61 1.72,63.47 1.82,63.34 1.93,63.22 2.05,63.1 2.17,62.99 2.3,62.88 2.43,62.78 2.57,62.69 2.71,62.6 2.85,62.52 3,62.44 3.15,62.38 3.31,62.32 3.46,62.27 3.62,62.22 3.79,62.19 3.95,62.16 4.11,62.14 4.28,62.13 4.45,62.13 4.61,62.13 4.78,62.14 4.94,62.16 5.1,62.19 5.27,62.22 5.43,62.27 5.58,62.32 5.74,62.38 5.89,62.44 6.04,62.52 6.18,62.6 6.32,62.69 6.46,62.78 6.59,62.88 6.72,62.99 6.84,63.1 6.96,63.22 7.07,63.34 7.17,63.47 7.27,63.61 7.36,63.75 7.44,63.89 7.52,64.03 7.59,64.19 7.65,64.34 7.71,64.5 7.75,64.65 7.79,64.81 7.83,64.98 7.85,65.14 7.87,65.31 7.87,65.47 7.87,65.55 59.07,65.55 59.07,65.46 59.08,65.37 59.1,65.28 59.13,65.19 59.17,65.11 59.21,65.03 59.26,64.96 59.31,64.89 59.37,64.82 59.44,64.76 59.51,64.71 59.59,64.66 59.67,64.62 59.75,64.59 59.84,64.56 59.93,64.54 60.02,64.53 60.11,64.53 60.2,64.54 60.29,64.55 60.37,64.57 60.46,64.6 60.54,64.64 60.62,64.68 60.69,64.73 60.76,64.79 60.83,64.85 60.89,64.92 60.94,64.99 60.98,65.07 61.02,65.15 61.05,65.24 61.08,65.32 61.09,65.41 61.1,65.5 61.1,65.59 61.1,65.64 62.12,65.64 62.12,65.47 62.13,65.31 62.14,65.14 62.17,64.98 62.2,64.81 62.24,64.65 62.28,64.5 62.34,64.34 62.4,64.19 62.47,64.03 62.55,63.89 62.63,63.75 62.72,63.61 62.82,63.47 62.92,63.34 63.03,63.22 63.15,63.1 63.27,62.99 63.4,62.88 63.53,62.78 63.67,62.69 63.81,62.6 63.95,62.52 64.1,62.44 64.25,62.38 64.41,62.32 64.57,62.27 64.73,62.22 64.89,62.19 65.05,62.16 65.21,62.14 65.38,62.13 65.55,62.13 65.71,62.13 65.88,62.14 66.04,62.16 66.2,62.19 66.37,62.22 66.53,62.27 66.68,62.32 66.84,62.38 66.99,62.44 67.14,62.52 67.28,62.6 67.43,62.69 67.56,62.78 67.69,62.88 67.82,62.99 67.94,63.1 68.06,63.22 68.17,63.34 68.27,63.47 68.37,63.61 68.46,63.75 68.54,63.89 68.62,64.03 68.69,64.19 68.75,64.34 68.81,64.5 68.86,64.65 68.89,64.81 68.93,64.98 68.95,65.14 68.97,65.31 68.97,65.47 68.97,65.64 68.97,65.8 68.95,65.97 68.93,66.13 68.89,66.29 68.86,66.46 68.81,66.61 68.75,66.77 68.69,66.92 68.62,67.07 68.54,67.22 68.46,67.36 68.37,67.5 68.27,67.64 68.17,67.77 68.06,67.89 67.94,68.01 67.82,68.12 67.69,68.23 67.56,68.33 67.43,68.42 67.28,68.51 67.14,68.59 66.99,68.67 66.84,68.73 66.68,68.79 66.53,68.84 66.37,68.88 66.2,68.92 66.04,68.95 65.88,68.97 65.71,68.98 65.55,68.98 65.38,68.98 65.21,68.97 65.05,68.95 64.89,68.92 64.73,68.88 64.57,68.84 64.41,68.79 64.25,68.73 64.1,68.67 63.95,68.59 63.81,68.51 63.67,68.42 63.53,68.33 63.4,68.23 63.27,68.12 63.15,68.01 63.03,67.89 62.92,67.77 62.82,67.64 62.72,67.5 62.63,67.36 62.55,67.22 62.47,67.07 62.4,66.92 62.34,66.77 62.28,66.61 62.24,66.46 62.2,66.29 62.17,66.13 62.14,65.97 62.13,65.8 62.12,65.64 61.1,65.64 61.09,65.68 61.08,65.77 61.05,65.86 61.02,65.94 60.98,66.02 60.94,66.1 60.89,66.17 60.83,66.24 60.76,66.3 60.69,66.36 60.62,66.41 60.54,66.46 60.46,66.49 60.37,66.52 60.29,66.54 60.2,66.56 60.11,66.56 60.02,66.56 59.93,66.55 59.84,66.53 59.75,66.51 59.67,66.48 59.59,66.43 59.51,66.39 59.44,66.33 59.37,66.27 59.31,66.21 59.26,66.14 59.21,66.06 59.17,65.98 59.13,65.9 59.1,65.81 59.08,65.73 59.07,65.64 59.07,65.55 7.87,65.55 7.87,65.64 7.87,65.8 7.85,65.97 7.83,66.13 7.79,66.29 7.75,66.46 7.71,66.61 7.65,66.77 7.59,66.92 7.52,67.07 7.44,67.22 7.36,67.36 7.27,67.5 7.17,67.64 7.07,67.77 6.96,67.89 6.84,68.01 6.72,68.12 6.59,68.23 6.46,68.33 6.32,68.42 6.18,68.51 6.04,68.59 5.89,68.67 5.74,68.73 5.58,68.79 5.43,68.84 5.27,68.88 5.1,68.92 4.94,68.95 4.78,68.97 4.61,68.98 4.45,68.98 4.28,68.98 4.11,68.97 3.95,68.95 3.79,68.92 3.62,68.88 3.46,68.84 3.31,68.79 3.15,68.73 3,68.67 2.85,68.59 2.71,68.51 2.57,68.42 2.43,68.33 2.3,68.23 2.17,68.12 2.05,68.01 1.93,67.89 1.82,67.77 1.72,67.64 1.62,67.5 1.53,67.36 1.45,67.22 1.37,67.07 1.3,66.92 1.24,66.77 1.18,66.61 1.14,66.46 1.1,66.29 1.06,66.13 1.04,65.97 1.02,65.8 1.02,65.64 0.64,65.64 0.64,69.34 69.34,69.34
GND on BOTTOM, L2_GND, L3_GND: 0.64,69.34 0.64,0.64 69.34,0.64 69.34,69.34
VIN on TOP (solid shape): 13.84,44.2 14.73,43.31 18.92,43.31 21.97,40.26 22.61,40.26 22.99,39.88 25.15,39.88 25.15,38.61 24.77,38.23 3.94,38.23 2.41,39.75 2.41,43.05 5.59,46.23 13.84,46.23
LX on TOP (solid shape): 42.16,35.69 39.88,35.69 39.84,35.65 39.72,35.65 39.72,35.53 38.23,34.04 31.37,34.04 29.08,36.32 29.08,39.88 36.83,39.88 37.97,41.02 42.16,41.02
VOUT on TOP (solid shape): 67.31,42.93 67.31,37.21 65.66,35.56 51.72,35.56 51.72,35.65 49.28,35.65 49.28,41.02 51.94,41.02 55.37,44.45 65.79,44.45

## Text on the board
Ref Des/Silkscreen Top: Made in U.S.A. | ENABLE | c 2014 | 12-76V | GND | VIN | 5V/3A | VOUT | BD9G341EFJ-E2EVK-101
L2_GND: L2_GND
L3_GND: L3_GND
User.17: 14. Rounding is allowed on 90 degree corners with the size of | 12. Inside corners should be rounded-off | 13. Changes to board geometries and apertures are not | 10. Bow and Twist | 11. Inspection | standard routing bit. | allowed unless they are approved by customer. | 4. Drilling | 5. Finish | 9. Packaging | 8. Cleanliness | 7. Electrical Test | 3. Soldermask | photoimageable soldermask, 003 max. thickness. | Soldermask over bare copper. | Soldermask is allowed in via holes. | Bow and twist to be .007 IN/IN or .090 max according to IPC-A-600D. | NOTES: | 2. Material | 6. Silkscreen | to conduct a thorough review of the artwork and media for | writing (in advance of manufacturing) of any changes, revisions,or | 1. Specifications. | as meaxured by the omega meter 600SMD. | A. All hole diameters are finished sizes. | B. All hole to be +/- .003 from true position unless otherwise specified. | C. All hole diameters to be +/- .003 unless otherwise specified. | D. An NC drill file has been supplied - see drill table. | A. Plate thru with copper .0010 min to .002 max. thickness drill size | dimension apply after plating. | B. Use gold immersion over nickel. | C. Finished boards shall not have nicks, | scratches, voids, exposed copper, poor plating, all misdrilled holes. | manufacturability in the supplier's process compliance to all | A. Boards shall be free of fiber glass dust or any other foreign material. | B. Finished boards must conform to 0.01 MG/IN max NAcL ionic contamination | A. All boards shall be 100% electrically tested for opens/short at 10 volts. | MIL-SPEC boards to be tested at 40 volts. | B. Apply test stamp in non-legend area on solder side of PCB. | C. Test is required on both sides of the board. | Solder mask both sides with (green color) liquid | A. FR4. | B. Color to be opaque. | A. Silkscreen using white non-conductive epoxy or equivalent (both sides). | B. No silkscreen allowed on exposed lands. | C. Silkscreen must be a minimum of 3mm away form fiducial marks. | D. Minimum clearance between silkscreen legend and vias, pads, or holes | to be .005. | E. Silkscreen is allowed in via holes. | There shall be a max of 25 units per package, individually wrapped, | and shipped in cardboard cratons with sufficient surrounding | material to prevend shipping damage. | A.Automatic optical inspection of all layers required. | B.The impedance should be controlled by stackup layer. | gerber and drill data when applicable. | A. Fabricate IAW  IPC600, latest revision. | B. Producibility study - It is the respondsibility  of the supplier | corrections made or recommendations to ensure conformance to | D. This drawing is to be used in conjunction with the provided | E. All notes are "Unless Otherwise Specified." | standards, and of  any specifications that  cannot be met. | applicable specifications. Customer must be advised in
User.29: Layer name | Prepreg | BOTTOM | L3_GND | TOP | Core | L2_GND | L | 1 | TOTAL 62 MILs +/-10% thickness board | a | - | y | 4 | e | r | s | 41.20 | 2.70 | 5.00 | T | ( | m | h | C | i | c | u | l | k | ) | . | D | P | w | 2 oz | t | H | F | o | z | p | V
User.30: FIGURE | SIZE | 12.0 | 20.0 | 40.0 | 63.0 | 150.0 | DRILL CHART: TOP to BOTTOM | ALL UNITS ARE IN MILS | TOLERANCE | +3.0/-10.0 | +3.0/-3.0 | PLATED | QTY | 713 | 21 | 3 | 4
